# Altium PCB Buckv8.PcbDoc
Units mm, origin at the board's own origin, x right, y up, seen from the top; angles counter-clockwise.
Board outline 172.5 x 65 mm, 2 copper layers (Top Layer, Bottom Layer); 19 components, 10 nets, 124 pads, 0 vias.
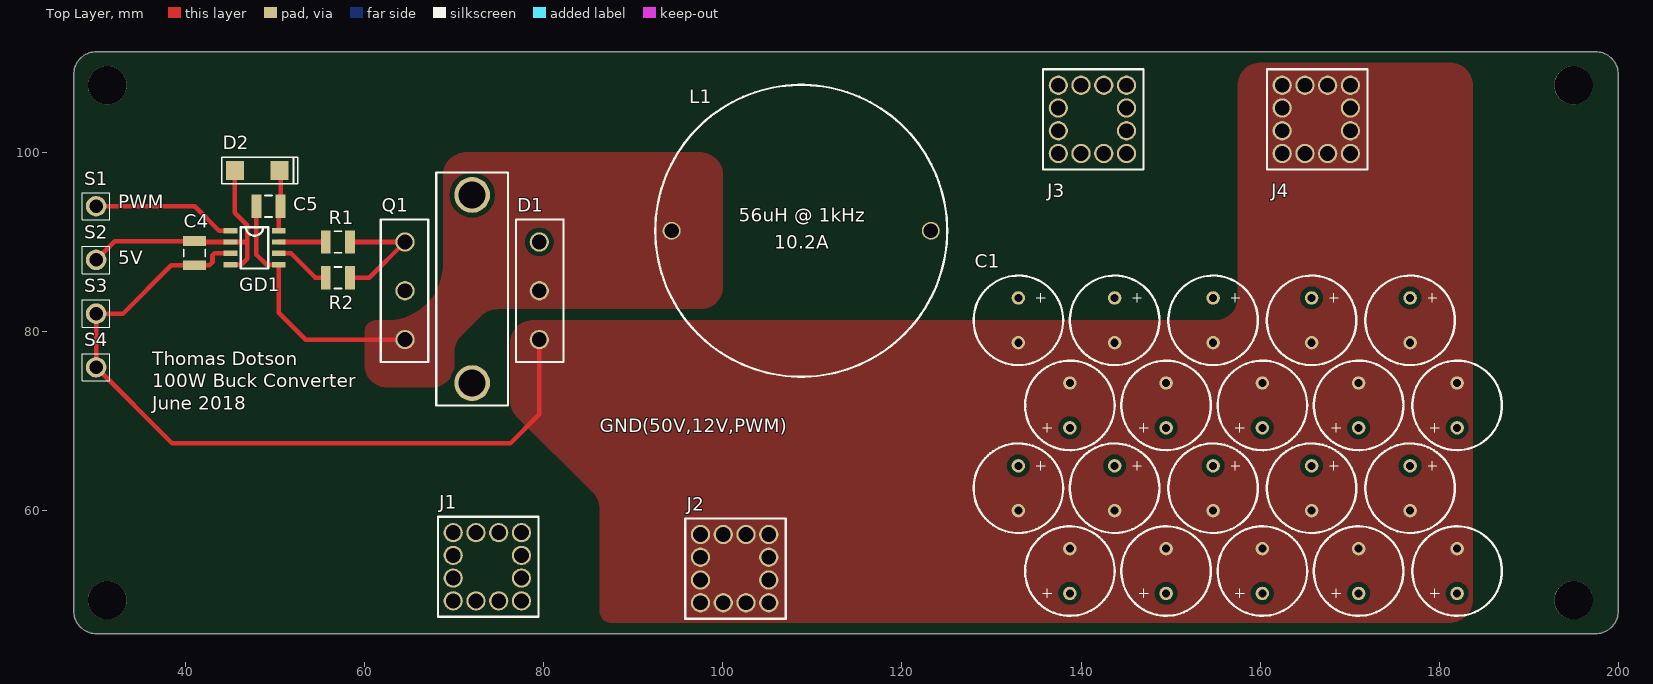
[diagram p0: Top Layer view]
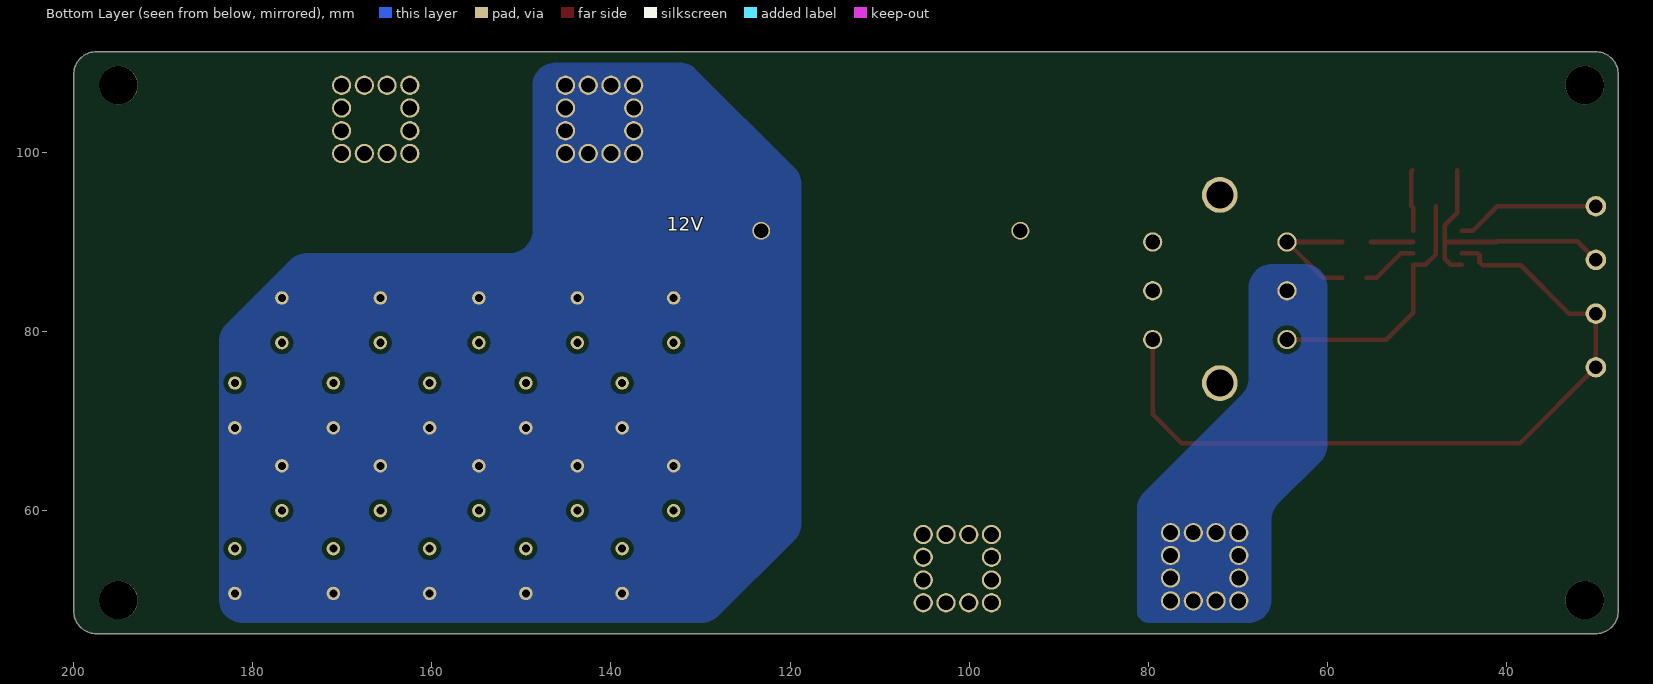
[diagram p1: Bottom Layer view, seen from below]

## Layer stack, top to bottom
Top Solder: solder mask 0.0102, Solder Resist, Dk 3.5
Top Layer: signal copper 0.0356
Dielectric 1: dielectric 0.32, FR-4, Dk 4.8
Bottom Layer: signal copper 0.0356
Bottom Solder: solder mask 0.0102, Solder Resist, Dk 3.5

## Board outline
30.04,111.25 ccw(c30.04,108.71) 27.5,108.71 27.5,48.79 ccw(c30.04,48.79) 30.04,46.25 197.46,46.25 ccw(c197.46,48.79) 200,48.79 200,108.71 ccw(c197.46,108.71) 197.46,111.25

## Design rules (kind name [scope] priority, off if disabled: settings)
Clearance [All] p1: gap=0.508 ignorepadtopadclearanceinfootprint=FALSE
HoleSize [All] p1: absolutevalues=TRUE maxlimit=4.572 minlimit=0.025 maxpercent=80.000 minpercent=20.000
MinimumSolderMaskSliver [All] p1: minsoldermaskwidth=0.127
PolygonConnect PolygonConnect_1 [All] p1: connectstyle=Direct reliefconductorwidth=0.254 reliefentries=4 polygonreliefangle="90 Angle" airgapwidth=0.254
PolygonConnect [All] p2: connectstyle=Relief reliefconductorwidth=0.254 reliefentries=4 polygonreliefangle="90 Angle" airgapwidth=0.254
RoutingVias [All] p1: holewidth=0.711 width=1.27 viastyle="Through Hole" minholewidth=0.711 minwidth=1.27 maxholewidth=0.711 maxwidth=1.27
SolderMaskExpansion [All] p1: expansion=0.102
Width [All] p1: maxlimit=2.54 minlimit=0.254 preferedwidth=0.254
28 further rules are at their usual default settings.

## Components (designator, comment, footprint, x,y, rotation, side; value= is the part's Value field where it differs from the comment)
* "CR301-25VE Heatsink" CR301-25VE 72,97.25 r90 top
C1 "470uF" "EPCOS TDK B4851" 182,53 r180 top
C4 "Cap Semi" C1210 41,88.75 r90 top value=10uF
C5 "Cap Semi" C1210 49.25,94 r0 top value=1uF
D1 "Diode" TO-247AC 82.098,76.6 r90 top
D2 "Diode" SOD128Diode 48,98 r0 top
GD1 "Si8271" "IPC-7351 SOIC127P600X173-8N" 45,91.27 r0 top
J1 "Bush7460408" Bush7460408 69.88,57.54 r0 top
J2 "Bush7460408" Bush7460408 97.5,57.33 r0 top
J3 "Bush7460408" Bush7460408 137.46,107.5 r0 top
J4 "Bush7460408" Bush7460408 162.46,107.5 r0 top
L1 "Bourns M8836-ND" "Bourns M8836-ND" 108.75,91.25 r0 top
Q1 "Infineon IRFP150NPbF" "Infineon IRFP150NPbF" 67.1,92.5 r270 top
R1 "Res3" 14-1210 57,90 r0 top value=22
R2 "Res3" 14-1210 57,86 r0 top value=22
S1 "VPWM" Sensor_Connecter 30,94 r90 top
S2 "5V" Sensor_Connecter 30,88 r90 top
S3 "GNDI" Sensor_Connecter 30,82 r90 top
S4 "GND_PWM" Sensor_Connecter 30,76 r90 top

## Footprints (in the part's own frame and the unit in brackets; to place one, negate y for a bottom-side part, rotate by r counter-clockwise, add the part's x,y. Pads: shape width x height; smd on the part's side, far side on the other; paste and mask are expansions set on the pad)
14-1210 [mm] "Chip Resistor, Body 3.2x2.5mm, IPC High Density"
  rect 1.1x2.6 smd: 1(-1.35,0) 2(1.35,0)
  silkscreen extent -0.4,-1.2 0.4,1.2, body extent -1.68,-1.32 1.68,1.32, height 0.9
"Bourns M8836-ND" [mm]
  round 2 hole 1.6: 1(-14.478,0) 2(14.478,0)
  silkscreen extent -16.3,-16.3 16.3,16.3
Bush7460408 [mm] "Power Connecter 12pin"
  round 2.15 hole 1.65: 1(0,-7.62) 1(0,-5.08) 1(0,-2.54) 1(0,0) 1(2.54,-7.62) 1(2.54,0) 1(5.08,-7.62) 1(5.08,0) 1(7.62,-7.62) 1(7.62,-5.08) 1(7.62,-2.54) 1(7.62,0)
  silkscreen extent -1.7,-9.4 9.53,1.78, body extent -1.83,-9.53 9.65,1.91, height 7
C1210 [mm] "Chip Capacitor, Body 3.2x2.5mm, IPC High Density"
  rect 1.1x2.6 smd: 1(-1.35,0) 2(1.35,0)
  silkscreen extent -0.4,-1.2 0.4,1.2, body extent -1.7,-1.35 1.7,1.35, height 1.3
CR301-25VE [mm] "Ohmite Heatsink   CR301-25VE Mouser 588-CR301-25VE"
  round 4 hole 3: 1(-23,0) 1(-2,0)
  silkscreen extent -25.5,-4 0.5,4
"EPCOS TDK B4851" [mm] "Aluminum Electrolytic Cap 100V 47uF x 10 Digikey 495-5978-ND"
  round 1.5 hole 0.9: 1(0,2.25) 1(0,-16.25) 1(5.25,-12) 1(5.25,-30.75) 1(11,2.25) 1(11,-16.25) 1(16.25,-30.75) 1(16.25,-12) 1(21.75,2.25) 1(21.75,-16.25) 1(27.25,-12) 1(27.25,-30.75) 1(32.5,-16.25) 1(32.5,2.25) 1(38.25,-12) 1(38.25,-30.75) 1(43.25,-16.25) 1(43.25,2.25) 1(49,-12) 1(49,-30.75) 2(0,-2.75) 2(0,-21.25) 2(5.25,-7) 2(5.25,-25.75) 2(11,-2.75) 2(11,-21.25) 2(16.25,-7) 2(16.25,-25.75) 2(21.75,-2.75) 2(21.75,-21.25) 2(27.25,-7) 2(27.25,-25.75) 2(32.5,-21.25) 2(32.5,-2.75) 2(38.25,-7) 2(38.25,-25.75) 2(43.25,-21.25) 2(43.25,-2.75) 2(49,-7) 2(49,-25.75)
  silkscreen extent -5,-33.25 54,4.75
"Infineon IRFP150NPbF" [mm]
  round 2.15 hole 1.65: 1(2.5,-2.6) 2(7.95,-2.6) 3(13.4,-2.6)
  silkscreen extent 0,-5.3 15.9,0
"IPC-7351 SOIC127P600X173-8N" [mm]
  rect 1.55x0.6 smd: 1(0,0) 2(0,-1.27) 3(0,-2.54) 4(0,-3.81) 5(5.4,-3.81) 6(5.4,-2.54) 7(5.4,-1.27) 8(5.4,0)
  silkscreen extent 1.15,-4.24 4.24,0.39
Sensor_Connecter [mil]
  round 90 hole 60: 1(0,0)
  silkscreen extent -60,-60 60,60
SOD128Diode [mm]
  rect 2x2.1 smd: A(-2.5,0) C(2.5,0)
  silkscreen extent -3.98,-1.5 4.52,1.48
TO-247AC [mm]
  round 2.15 hole 1.65: 1(2.5,2.598) 2(7.95,2.598) 3(13.4,2.598)
  silkscreen extent 0,-0.1 15.9,5.2

## Part data
*: "Ohmite Heatsink   CR301-25VE Mouser 588-CR301-25VE"
C4: "CAP CER 10UF 50V X7S 1210 @Digikey 445-4537-1-ND or C3225X7S1H106M250AB", LatestRevisionDate=29-May-2009, LatestRevisionNote="IPC-7351 Footprint Added.", PackageDescription="Chip Capacitor", PackageReference=C1206, Published=8-Jun-2000, Publisher="Altium Limited"
C5: "Samsung Electro-Mechanics CAP Ceramic 1uF 50V Digikey 1276-1811-1-ND", LatestRevisionDate=29-May-2009, LatestRevisionNote="IPC-7351 Footprint Added.", PackageDescription="Chip Capacitor", PackageReference=C1206, Published=8-Jun-2000, Publisher="Altium Limited"
D1: library part "Vishay Semiconductors VS-STPS30L60CW-N3", "Vishay Semiconductors Schottky Rectifier Diode / Digikey VS-STPS30L60CW-N3GI-ND"
D2: "Schottky Diode 30V 5A / Digikey 568-6519-1-ND"
GD1: "8-Pin Gate Driver"
R1 R2: "Stackpole Electronics Resistor 22 Ohms / 0.5W Digikey RMCF1210JT22R0TR-ND", LatestRevisionDate=29-May-2009, LatestRevisionNote="IPC-7351 Footprint Added.", PackageDescription="Chip Resistor", PackageReference=J1-0603, Published=8-Jun-2000, Publisher="Altium Limited"
S1 S2 S3 S4: library part Sensor_Connecter, "Sensor Connecter"

## Free pads (board coordinates)
  round 4.3 hole 4.3: 3(31.25,50) 4(31.25,107.5) 5(195,107.5) 6(195,50)

## Nets (pads, with @x,y where several pads share a name; then routed paths per layer and width w, separated by ;. In a path a pad name is that pad's centre, name@x,y a point inside that pad or via, vN(x,y) a via of type N, cw(c..) or ccw(c..) an arc to the next point about the centre after c; other vN are vias at no path point)
GND: C1.2 C4.1 D1.1 GD1.3 J2.1 J4.1 S3.1 S4.1 | length 86.9
  Top Layer w0.508: GD1.3 43.23,88.73 43,88.5 43,87.75 42.65,87.4 C4.1 38.4,87.4 33,82 S3.1 S4.1 38.5,67.5 76.25,67.5 79.5,70.75 D1.1
NetC1_1: C1.1 J3.1 L1.2
NetC4_2: C4.2 D2.A GD1.2 GD1.4 S2.1 | length 30.4
  Top Layer w0.508: S2.1 32.1,90.1 C4.2 ccw(c41.1,90.1) 41.1,90 GD1.2 46.884,90 ; GD1.4 46.21,87.46 46.884,88.134 46.884,90 ; D2.A 45.5,93.25 46.884,91.866 46.884,90
NetC5_2: C5.2 D2.C GD1.8 | length 6.9
  Top Layer w0.508: GD1.8 50.4,93.8 C5.2 50.6,97.9 D2.C
NetGD1_1: GD1.1 S1.1 | length 16.1
  Top Layer w0.508: S1.1 41,94 43.73,91.27 GD1.1
NetGD1_6: GD1.6 R2.1 | length 6.4
  Top Layer w0.508: GD1.6 51.77,88.73 54.5,86 R2.1
NetGD1_7: GD1.7 R1.1 | length 4.8
  Top Layer w0.508: GD1.7 R1.1@55.15,90
NetJ1_1: J1.1 Q1.2
VG+: Q1.1 R1.2 R2.2 | length 14
  Top Layer w0.508: R2.2 60.5,86 Q1.1 R1.2
VG-: C5.1 D1.2 GD1.5 L1.1 Q1.3 | length 29.1
  Top Layer w0.508: C5.1 47.9,88.6 49.04,87.46 GD1.5 50.4,82.1 53.4,79.1 Q1.3
pads on no net: *.1 D1.3

## Polygon pours and split planes (outlines as drawn)
NetC1_1 on Bottom Layer "Bottom Layer-No Net" (solid, pour order 22): 132.302,110 ccw(c132.302,107.46) 130.506,109.256 119.494,98.244 ccw(c121.29,96.448) 118.75,96.448 118.75,58.552 ccw(c121.29,58.552) 119.494,56.756 128.006,48.244 ccw(c129.802,50.04) 129.802,47.5 181.21,47.5 ccw(c181.21,50.04) 183.75,50.04 183.75,78.948 ccw(c181.21,78.948) 183.006,80.744 175.744,88.006 ccw(c173.948,86.21) 173.948,88.75 151.29,88.75 cw(c151.29,91.29) 148.75,91.29 148.75,107.46 ccw(c146.21,107.46) 146.21,110
NetJ1_1 on Bottom Layer "Bottom Layer-No Net 1" (solid, pour order 12): 62.54,87.5 ccw(c62.54,84.96) 60,84.96 60,67.302 ccw(c62.54,67.302) 60.744,65.506 65.506,60.744 cw(c63.71,58.948) 66.25,58.948 66.25,50 ccw(c68.75,50) 68.75,47.5 80,47.5 ccw(c80,48.75) 81.25,48.75 81.25,60.198 ccw(c78.71,60.198) 80.506,61.994 69.494,73.006 cw(c71.29,74.802) 68.75,74.802 68.75,84.96 ccw(c66.21,84.96) 66.21,87.5
no net on Bottom Layer "Bottom Layer-No Net 2" (solid, pour order 2): 62.5,87.5
GND on Top Layer "Top Layer-No Net" (solid, pour order 24): 78.79,81.25 ccw(c78.79,78.71) 76.25,78.71 76.25,72.302 ccw(c78.79,72.302) 76.994,70.506 85.506,61.994 cw(c83.71,60.198) 86.25,60.198 86.25,48.75 ccw(c87.5,48.75) 87.5,47.5 181.21,47.5 ccw(c181.21,50.04) 183.75,50.04 183.75,107.46 ccw(c181.21,107.46) 181.21,110 160.04,110 ccw(c160.04,107.46) 157.5,107.46 157.5,83.79 cw(c154.96,83.79) 154.96,81.25
no net on Top Layer "Top Layer-No Net 1" (solid, pour order 20): 122.5,100
VG- on Top Layer "Top Layer-No Net 2" (solid, pour order 18): 97.46,82.5 ccw(c97.46,85.04) 100,85.04 100,97.46 ccw(c97.46,97.46) 97.46,100 71.29,100 ccw(c71.29,97.46) 68.75,97.46 68.75,87.5 cw(c62.5,87.5) 62.5,81.25 61.25,81.25 ccw(c61.25,80) 60,80 60,76.25 ccw(c62.5,76.25) 62.5,73.75 67.5,73.75 ccw(c67.5,76.25) 70,76.25 70,77.698 cw(c72.54,77.698) 70.744,79.494 73.006,81.756 cw(c74.802,79.96) 74.802,82.5
no net on Top Layer "Top Layer-No Net 3" (solid, pour order 10): 62.5,82.5

## Silkscreen, mask and mechanical layers (free items; w line width, h text height)
Top Overlay:
  text "PWM" at 32.5,93.75 h1.52
  text "5V" at 32.5,87.5 h1.52
  text "Thomas Dotson" at 36.25,76.25 h1.52
  text "100W Buck Converter" at 36.25,73.75 h1.52
  text "June 2018" at 36.25,71.25 h1.52
  text "GND(50V,12V,PWM)" at 86.25,68.75 h1.52
Bottom Overlay:
  text "12V" at 133.75,91.25 h1.52

## Text inside footprints (layer, text, board x,y; h text height)
L1: Top Overlay "56uH @ 1kHz" at 101.75,92.25 h1.52; Top Overlay "10.2A" at 105.75,89.25 h1.52